# EAGLE board Schematic v31 (EAGLE 9.7.0)

Size 62.37 x 62.37 mm. Coordinates in mm from the lower left corner, seen from the top.
Outline: 28.5,62.37 arc80 0,33.87 0.07,33.86 arc-160 0.23,28.54 0,28.5 arc80 28.5,0 28.51,0.07 arc-160 33.83,0.23 33.87,0 arc80 62.37,28.5 62.29,28.51 arc-160 62.14,33.83 62.37,33.87 arc80 33.87,62.37 arc-167 28.5,62.37
Outline: circle at 47.72,44.3 radius 0.75
Outline: circle at 50.08,46.23 radius 0.9
Outline: circle at 44.29,47.73 radius 0.75
Outline: circle at 46.22,50.09 radius 0.9
Copper layers (1+2*15+16): Top 0.035mm / dielectric 1.5mm / Route2 0.035mm / dielectric 0.15mm / Route15 0.035mm / dielectric 0.2mm / Bottom 0.035mm
Design rules "default *": minimum track width 0.35mm, minimum drill 0.35mm, track to track 6mil, track to pad 6mil, pad to pad 6mil, via to via 6mil, smd to smd 6mil, copper to edge 40mil, drill to drill 6mil, minimum pad ring 10mil, minimum via ring 8mil, stop-mask expansion 4mil, vias tented up to drill 0mil, thermal gap 10mil

## Footprints (pad centres in the part's own frame; a part is rotated, then mirrored left to right if it is on the bottom)
CAPC1608X85 = smd 0.921 x 0.97: 1 -0.775,0; 2 0.775,0
CAPC1110X102 = smd 0.663 x 1.282: 1 -0.539,0; 2 0.539,0
LED-0603 = smd 1 x 1: A -0.877,0; C 0.877,0
3,2-PAD = drill 3.2 pad 5.842: B3,2 0,0
JST_B4B-PH-KL(LF)(SN) = drill 0.8 square: 1 3,-0.55 | drill 0.8: 2 1,-0.55; 3 -1,-0.55; 4 -3,-0.55
JST_B2B-PH-K-S(LF)(SN) = drill 0.8 square: 1 1,-0.55 | drill 0.8: 2 -1,-0.55
1X03 = drill 1.016 long: 1 -2.54,0; 2 0,0; 3 2.54,0
1X02 = drill 1.016 long: 1 -1.27,0; 2 1.27,0
2X06 = drill 1.016 octagon: 1 -6.35,-1.27; 2 -6.35,1.27; 3 -3.81,-1.27; 4 -3.81,1.27; 5 -1.27,-1.27; 6 -1.27,1.27; 7 1.27,-1.27; 8 1.27,1.27; 9 3.81,-1.27; 10 3.81,1.27; 11 6.35,-1.27; 12 6.35,1.27
INDUCTOR_2X2 = smd 0.65 x 2: P$1 -0.675,0; P$2 0.675,0
SOT23-3 = smd 0.8 x 0.9: 1 -0.95,-1; 2 0.95,-1; 3 0,1.1
DPAK228P994X240-4N = smd 0.97 x 3.02: 1 -2.286,-4.09; 3 2.286,-4.09 | smd 5.67 x 6.32: 4 0,2.44
RESC1608X60 = smd 0.799 x 0.974: 1 -0.815,0; 2 0.815,0
QFN_BNO055_BOS = smd 0.305 x 0.533: 1 -2.25,1.537; 6 -2.25,-1.537; 7 -1.75,-1.537; 8 -1.25,-1.537; 9 -0.75,-1.537; 10 -0.25,-1.537; 11 0.25,-1.537; 12 0.75,-1.537; 13 1.25,-1.537; 14 1.75,-1.537; 15 2.25,-1.537; 20 2.25,1.537; 21 1.75,1.537; 22 1.25,1.537; 23 0.75,1.537; 24 0.25,1.537; 25 -0.25,1.537; 26 -0.75,1.537; 27 -1.25,1.537; 28 -1.75,1.537 | smd 0.432 x 0.305: 2 -2.235,0.75; 3 -2.235,0.25; 4 -2.235,-0.25; 5 -2.235,-0.75; 16 2.235,-0.75; 17 2.235,-0.25; 18 2.235,0.25; 19 2.235,0.75
PICO-PKG-TH = drill 1: 1 -8.89,24.13; 2 -8.89,21.59; 3 -8.89,19.05; 4 -8.89,16.51; 5 -8.89,13.97; 6 -8.89,11.43; 7 -8.89,8.89; 8 -8.89,6.35; 9 -8.89,3.81; 10 -8.89,1.27; 11 -8.89,-1.27; 12 -8.89,-3.81; 13 -8.89,-6.35; 14 -8.89,-8.89; 15 -8.89,-11.43; 16 -8.89,-13.97; 17 -8.89,-16.51; 18 -8.89,-19.05; 19 -8.89,-21.59; 20 -8.89,-24.13; 21 8.89,-24.13; 22 8.89,-21.59; 23 8.89,-19.05; 24 8.89,-16.51; 25 8.89,-13.97; 26 8.89,-11.43; 27 8.89,-8.89; 28 8.89,-6.35; 29 8.89,-3.81; 30 8.89,-1.27; 31 8.89,1.27; 32 8.89,3.81; 33 8.89,6.35; 34 8.89,8.89; 35 8.89,11.43; 36 8.89,13.97; 37 8.89,16.51; 38 8.89,19.05; 39 8.89,21.59; 40 8.89,24.13; 41 -2.54,-23.9; 42 0,-23.9; 43 2.54,-23.9 | hole 1.8: -2.725,24; 2.725,24 | hole 1.5: -2.425,20.97; 2.425,20.97
LED_4492 = smd 0.55 x 0.55: 1 -0.475,0.475; 2 -0.475,-0.475; 3 0.475,-0.475; 4 0.475,0.475
IC_TPS63020DSJR = smd 0.6 x 0.24: 1 -1.4,1.5; 2 -1.4,1; 3 -1.4,0.5; 4 -1.4,0; 5 -1.4,-0.5; 6 -1.4,-1; 7 -1.4,-1.5; 8 1.4,-1.5; 9 1.4,-1; 10 1.4,-0.5; 11 1.4,0; 12 1.4,0.5; 13 1.4,1; 14 1.4,1.5 | smd 1.5 x 2.8: 15 0,0 | drill 0.2 pad 0.3: 16 -0.5,1; 17 0,1; 18 0.5,1; 19 -0.5,0.5; 20 0,0.5; 21 0.5,0.5; 22 -0.5,0; 23 0,0; 24 0.5,0; 25 -0.5,-0.5; 26 0,-0.5; 27 0.5,-0.5; 28 -0.5,-1; 29 0,-1; 30 0.5,-1
XDCR_BMP390L = smd 0.25 x 0.275: 1 0.25,0.762; 2 -0.25,0.762; 6 -0.25,-0.762; 7 0.25,-0.762 | smd 0.275 x 0.25: 3 -0.762,0.5; 4 -0.762,0; 5 -0.762,-0.5; 8 0.762,-0.5; 9 0.762,0; 10 0.762,0.5
XTAL330X1051X90N = smd 1 x 1.8: 1 -1.25,0; 2 1.25,0

## Placement (x,y rotation side)
C1  1μF  [CAPC1608X85]  24.55,18.1 0 top
C2  100nF  [CAPC1608X85]  24.55,21.66 0 top
C3  120nF  [CAPC1608X85]  24.55,19.88 0 top
C4  100nF  [CAPC1608X85]  16.23,20.14 180 top
C5  100nF  [CAPC1608X85]  16.23,24.2 0 top
C6  10n  [CAPC1110X102]  28.26,22.93 0 top
C7  100n  [CAPC1110X102]  28.26,20.77 0 top
C8  22UF  [CAPC1110X102]  28.77,26.55 0 top
C9  22uF  [CAPC1110X102]  26.87,26.55 0 top
C10  22UF  [CAPC1110X102]  24.96,26.55 0 top
C11  120nF  [CAPC1608X85]  21.43,40.66 180 top
C12  120nF  [CAPC1608X85]  21.43,38.55 0 top
D1  Red  [LED-0603]  18.74,39.57 270 top
D2  Red  [LED-0603]  23.64,47.19 270 top
H1  MOUNT-PAD-ROUND3.2  [3,2-PAD]  31.18,7.68 0 top
H2  MOUNT-PAD-ROUND3.2  [3,2-PAD]  54.68,31.18 0 top
H3  MOUNT-PAD-ROUND3.2  [3,2-PAD]  31.18,54.68 0 top
H4  MOUNT-PAD-ROUND3.2  [3,2-PAD]  7.68,31.18 0 top
J1  B4B-PH-KL(LF)(SN)  [JST_B4B-PH-KL(LF)(SN)]  44.39,25.09 45 top
J2  B4B-PH-KL(LF)(SN)  [JST_B4B-PH-KL(LF)(SN)]  37.15,17.85 45 top
J3  B2B-PH-K-S(LF)(SN)  [JST_B2B-PH-K-S(LF)(SN)]  44.14,8.83 90 top
J4  B2B-PH-K-S(LF)(SN)  [JST_B2B-PH-K-S(LF)(SN)]  44.14,14.93 90 top
JP1  PINHD-1X3  [1X03]  15.51,8.34 135 top
JP2  PINHD-1X3  [1X03]  8.17,15.47 135 top
JP3  PINHD-1X2  [1X02]  3.52,24.88 90 top
JP4  PINHD-1X2  [1X02]  6.85,24.96 90 top
JP5  PINHD-2X6  [2X06]  51.11,17.87 270 top
L1  1.5uH  [INDUCTOR_2X2]  11.95,35.48 180 top
Q1  220mA/50V/3.5Ω  [SOT23-3]  17.47,54 0 top
Q2  220mA/50V/3.5Ω  [SOT23-3]  13.87,54 0 top
Q3  220mA/50V/3.5Ω  [SOT23-3]  21.04,54 0 top
Q4  AOD4184A  [DPAK228P994X240-4N]  9.34,40.72 90 top
Q5  AOD4184A  [DPAK228P994X240-4N]  14.43,48.47 90 top
R1  10K  [RESC1608X60]  20.42,25.85 0 top
R2  4.7K  [RESC1608X60]  20.42,23.88 0 top
R3  4.7K  [RESC1608X60]  20.42,21.91 0 top
R4  10K  [RESC1608X60]  20.42,20.01 0 top
R5  4.7K  [RESC1608X60]  16.23,18.1 0 top
R6  4.7K  [RESC1608X60]  16.23,22.17 0 top
R7  10K  [RESC1608X60]  24.07,50.49 90 top
R8  10K  [RESC1608X60]  25.31,50.49 90 top
R9  10K  [RESC1608X60]  26.55,50.49 90 top
R10  10K  [RESC1608X60]  25.25,47.82 90 top
R11  10K  [RESC1608X60]  26.48,47.82 90 top
R12  10K  [RESC1608X60]  27.72,47.82 90 top
R13  [RESC1608X60]  20.42,27.76 0 top
R14  [RESC1608X60]  20.42,18.1 0 top
R15  [RESC1608X60]  16.71,38.42 0 top
R16  [RESC1608X60]  16.71,40.71 0 top
R17  [RESC1608X60]  16.71,43 0 top
R18  [RESC1608X60]  21.53,48.46 0 top
R19  [RESC1608X60]  21.53,46.17 180 top
R20  [RESC1608X60]  21.53,50.74 0 top
R21  [RESC1608X60]  13.6,31.55 0 top
U1  BNO055QFN_BNO055_BOS  [QFN_BNO055_BOS]  26.87,34.49 45 top
U2  RASPBERRY_PICOTH  [PICO-PKG-TH]  31.18,31.19 315 top
U3  4492  [LED_4492]  18.48,57.09 0 top
U4  4492  [LED_4492]  20.73,57.09 0 top
U5  4492  [LED_4492]  22.98,57.09 0 top
U6  4492  [LED_4492]  48.15,30.74 135 top
U7  4492  [LED_4492]  25.18,57.09 0 top
U8  TPS63020DSJR  [IC_TPS63020DSJR]  16.2,35.12 90 top
U11  BMP390L  [XDCR_BMP390L]  18.87,14.42 45 top
XTAL1  32.768 kHz  [XTAL330X1051X90N]  21.91,43 180 top

## Library data of the parts
C1-C12 = Capacitor; CATEGORY: Capacitor
D1 D2 = SparkFun-LED; PROD_ID: DIO-16511
H1-H4 = holes
J1 J2 = JST Sales B4B-PH-KL footprint; AVAILABILITY: In Stock; CHECK_PRICES: https://www.snapeda.com/parts/B4B-PH-KL(LF)(SN)/JST+Sales+America+Inc./view-part/?ref=eda; DESCRIPTION: Connector Header Through Hole 4 position 0.079 (2.00mm); MF: JST Sales; MP: B4B-PH-KL(LF)(SN); PACKAGE: None; PRICE: None; SNAPEDA_LINK: https://www.snapeda.com/parts/B4B-PH-KL(LF)(SN)/JST+Sales+America+Inc./view-part/?ref=snap
J3 J4 = JST Sales B2B-PH-K-S footprint; AVAILABILITY: In Stock; CHECK_PRICES: https://www.snapeda.com/parts/B2B-PH-K-S(LF)(SN)/JST+Sales+America+Inc./view-part/?ref=eda; DESCRIPTION: Connector Header Through Hole 2 position 0.079 (2.00mm); MF: JST Sales; MP: B2B-PH-K-S(LF)(SN); PACKAGE: None; PRICE: None; SNAPEDA_LINK: https://www.snapeda.com/parts/B2B-PH-K-S(LF)(SN)/JST+Sales+America+Inc./view-part/?ref=snap
JP1 JP2 = Connector; CATEGORY: Headers; DESCRIPTION: Header, Straight, 3 Position; MANUFACTURER: Generic; MPN: Generic; OPERATING_TEMPERATURE: Generic; PART_STATUS: Active; PITCH: 0.100" (2.54mm); ROHS_COMPLIANCE: Generic; SERIES: Generic; SUB-CATEGORY: Headers, Male Pins; TYPE: Board to Board or Cable, Unshrouded, Through Hole, Straight
JP3 JP4 = Connector; CATEGORY: Headers; DESCRIPTION: Header, Straight, 2 Position; MANUFACTURER: Generic; MPN: Generic; OPERATING_TEMPERATURE: Generic; PART_STATUS: Active; PITCH: 0.100" (2.54mm); ROHS_COMPLIANCE: Generic; SERIES: Generic; SUB-CATEGORY: Headers, Male Pins; TYPE: Board to Board or Cable, Unshrouded, Through Hole, Straight
JP5 = Connector; CATEGORY: Headers; DESCRIPTION: Header, Straight, 2x6 Position; MANUFACTURER: Generic; MPN: Generic; OPERATING_TEMPERATURE: Generic; PART_STATUS: Active; PITCH: 0.100" (2.54mm); ROHS_COMPLIANCE: Generic; SERIES: Generic; SUB-CATEGORY: Headers, Male Pins; TYPE: Board to Board or Cable, Unshrouded, Through Hole, Straight
L1 = SparkFun-Coils; PROD_ID: NDUC-15405
Q1-Q3 = SparkFun-DiscreteSemi; PROD_ID: TRANS-00830
Q4 Q5 = AOD4184A footprint; AVAILABILITY: In Stock; CHECK_PRICES: https://www.snapeda.com/parts/AOD4184A/Alpha+%2526+Omega+Semiconductor+Inc./view-part/?ref=eda; DESCRIPTION: N-Channel 40 V 13A (Ta), 50A (Tc) 2.3W (Ta), 50W (Tc) Surface Mount TO-252 (DPAK); MF: Alpha & Omega Semiconductor Inc.; MP: AOD4184A; PACKAGE: None; PRICE: None; SNAPEDA_LINK: https://www.snapeda.com/parts/AOD4184A/Alpha+%2526+Omega+Semiconductor+Inc./view-part/?ref=snap
R1-R21 = Resistor; CATEGORY: Resistor; SUB-CATEGORY: Fixed
U1 = 2024-07-31_17-07-40_Library; COPYRIGHT: Copyright (C) 2024 Ultra Librarian. All rights reserved.; MANUFACTURER_PART_NUMBER: BNO055; MFR_NAME: Bosch Sensortec
U2 = RPI Pico Eagle lib
U3-U7 = Adafruit 4492; AVAILABILITY: In Stock; CHECK_PRICES: https://www.snapeda.com/parts/4492/Adafruit+Industries/view-part/?ref=eda; DESCRIPTION: Adafruit Accessories NeoPixel Addressable 1515 LEDs (1.5mm x 1.5mm) - 10 pack - SK6805-E-J; MF: Adafruit; MP: 4492; PACKAGE: None; PRICE: None; PURCHASE-URL: https://www.snapeda.com/api/url_track_click_mouser/?unipart_id=6292704&manufacturer=Adafruit&part_name=4492&search_term=neopixel; SNAPEDA_LINK: https://www.snapeda.com/parts/4492/Adafruit+Industries/view-part/?ref=snap
U8 = TPS63020DSJR Texas Instruments; AVAILABILITY: In Stock; CHECK_PRICES: https://www.snapeda.com/parts/TPS63020DSJR/Texas+Instruments/view-part/?ref=eda; DESCRIPTION: High Efficiency Single Inductor Buck-Boost Converter with 4A Switch; MF: Texas Instruments; MP: TPS63020DSJR; PACKAGE: VSON-14 Texas Instruments; PRICE: None; PURCHASE-URL: https://www.snapeda.com/api/url_track_click_mouser/?unipart_id=296571&manufacturer=Texas Instruments&part_name=TPS63020DSJR&search_term=None; SNAPEDA_LINK: https://www.snapeda.com/parts/TPS63020DSJR/Texas+Instruments/view-part/?ref=snap
U11 = BMP390L footprint symbol; AVAILABILITY: In Stock; CHECK_PRICES: https://www.snapeda.com/parts/BMP390L/Bosch+Sensortec/view-part/?ref=eda; DESCRIPTION: Pressure Sensor Development Tools Evaluation Shuttle Board for the BMP390L; MF: Bosch Sensortec; MP: BMP390L; PACKAGE: None; PRICE: None; PURCHASE-URL: https://www.snapeda.com/api/url_track_click_mouser/?unipart_id=4817101&manufacturer=Bosch Sensortec&part_name=BMP390L&search_term=bmp390; SNAPEDA_LINK: https://www.snapeda.com/parts/BMP390L/Bosch+Sensortec/view-part/?ref=snap
XTAL1 = Frequency-Source; DESCRIPTION: kHz RANGE CRYSTAL UNIT; FREQUENCY: 32.768 kHz; MANUFACTURER: Seiko Epson Corporation; MPN: FC-135; OPERATING_TEMPERATURE: -40°C to 85°C; PART_STATUS: Active; ROHS_COMPLIANT: COMPLIANT; SERIES: FC - 135; SUB_CATEGORY: CRYSTAL; TYPE: CRYSTAL

## Nets
BMP390_INT: U2.10 U11.7
BMP390_MODE_SEL: C5.1 R5.2 R6.2 U2.20 U11.1 U11.6
GND: C1.1 C2.1 C3.2 C4.2 C5.2 C6.1 C7.1 C8.1 C9.1 C10.1 D1.C D2.C J1.4 J2.4 J3.1 J4.1 Q4.3 Q5.3 R13.1 R16.1 R19.1 R21.2 U1.2 U1.5 U1.6 U1.18 U1.25 U2.3 U2.8 U2.13 U2.18 U2.23 U2.28 U2.33 U2.38 U3.4 U4.4 U5.4 U6.4 U7.4 U8.2 U8.15 U11.3 U11.8 U11.9
HV_DATA_NEOPIXEL: Q3.3 R9.1 U2.9 U3.1
HV_RX_ELRS: J2.1 Q2.3 R8.1
HV_TX_ELRS: J2.2 Q1.3 R10.1
LV_DATA_NEOPIXEL: Q3.2 R11.1
LV_RX_ELRS: Q2.2 R7.1 U2.1
LV_TX_ELRS: Q1.2 R12.1 U2.2
N$1: C1.2 U1.9
N$2: R1.1 U1.4
N$3: L1.P$1 U8.8 U8.9
N$4: U3.3 U4.1
N$5: U4.3 U5.1
N$6: U5.3 U6.1
N$7: U6.3 U7.1
N$8: L1.P$2 U8.6 U8.7
N$9: R14.2 R21.1 U8.3
N$10: JP1.2 U8.13
N$11: Q4.1 R15.2 R16.2 R17.1
N$12: D1.A R15.1
N$13: JP3.2 Q4.4
N$14: Q5.1 R13.2 R18.2 R19.2 R20.1
N$15: D2.A R18.1
N$16: JP4.2 Q5.4
N$22: C12.1 U1.26 XTAL1.1
N$23: C11.1 U1.27 XTAL1.2
N$24: C11.2 C12.2
NRESET: JP2.3 R4.1 U1.11
RX_GPS: J1.1 U2.6
SCL: R3.2 R5.1 U1.19 U2.21 U11.2
SDA: R2.2 R6.1 U1.20 U2.22 U11.4
SWCLK_BNO055: JP2.1 U1.8
SWDIO_BNO055: JP2.2 U1.7
SWGND: U2.42
TRIG_CHARGE_1: R17.2 U2.4
TRIG_CHARGE_2: R20.2 U2.5
TX_GPS: J1.2 U2.7
VBUS: U2.40
VCC_3_3: J1.3 JP5.4 JP5.6 Q1.1 Q2.1 Q3.1 R7.2 R11.2 R12.2 U2.36
VCC_3_3_BMP390L: C4.1 JP5.5 U11.10
VCC_3_3_BNO055: C2.2 C3.1 JP5.3 R1.2 R2.1 R3.1 R4.2 U1.3 U1.28
VCC_5: C8.2 C9.2 C10.2 JP1.3 JP5.2 R8.2 R9.2 R10.2 R14.1 U3.2 U4.2 U5.2 U6.2 U7.2 U8.4 U8.5
VCC_5_ELRS: J2.3 JP5.1
VCC_CHARGES: JP3.1 JP4.1 JP5.9 JP5.10
VCC_IN: C6.2 C7.2 J3.2 JP1.1 JP5.7 JP5.8 U2.39 U8.1 U8.10 U8.11 U8.12
VCC_IN_CHARGES: J4.2 JP5.11 JP5.12

## Tracks (layer width: path | path; a pad name or v marks a point on that pad's centre or on a via)
BMP390_INT  (1 unrouted)
BMP390_MODE_SEL  (5 unrouted)
GND  (44 unrouted)
HV_DATA_NEOPIXEL  (3 unrouted)
HV_RX_ELRS  (2 unrouted)
HV_TX_ELRS  (2 unrouted)
LV_DATA_NEOPIXEL  (1 unrouted)
LV_RX_ELRS  (2 unrouted)
LV_TX_ELRS  (2 unrouted)
N$1  (1 unrouted)
N$2  (1 unrouted)
N$3  (2 unrouted)
N$4  (1 unrouted)
N$5  (1 unrouted)
N$6  (1 unrouted)
N$7  (1 unrouted)
N$8  (2 unrouted)
N$9  (2 unrouted)
N$10  (1 unrouted)
N$11  (3 unrouted)
N$12  (1 unrouted)
N$13  (1 unrouted)
N$14  (4 unrouted)
N$15  (1 unrouted)
N$16  (1 unrouted)
N$22  (2 unrouted)
N$23  (2 unrouted)
N$24  (1 unrouted)
NRESET  (2 unrouted)
RX_GPS  (1 unrouted)
SCL  (4 unrouted)
SDA  (4 unrouted)
SWCLK_BNO055  (1 unrouted)
SWDIO_BNO055  (1 unrouted)
TRIG_CHARGE_1  (1 unrouted)
TRIG_CHARGE_2  (1 unrouted)
TX_GPS  (1 unrouted)
VCC_3_3  (9 unrouted)
VCC_3_3_BMP390L  (2 unrouted)
VCC_3_3_BNO055  (8 unrouted)
VCC_5  (15 unrouted)
VCC_5_ELRS  (1 unrouted)
VCC_CHARGES  (3 unrouted)
VCC_IN  (10 unrouted)
VCC_IN_CHARGES  (2 unrouted)